# EAGLE board Fenyjelzo_duplatranz lábcsere (EAGLE 7.2.0), part 1 of 2
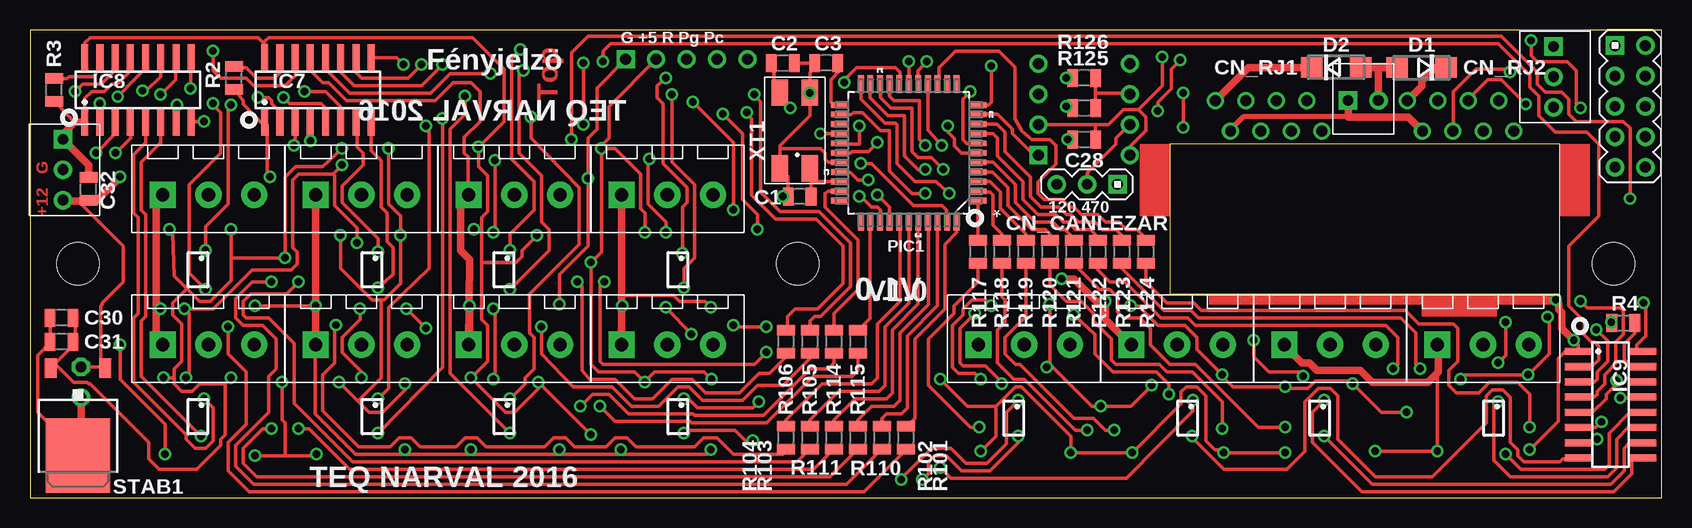
[diagram p0: board, top side]
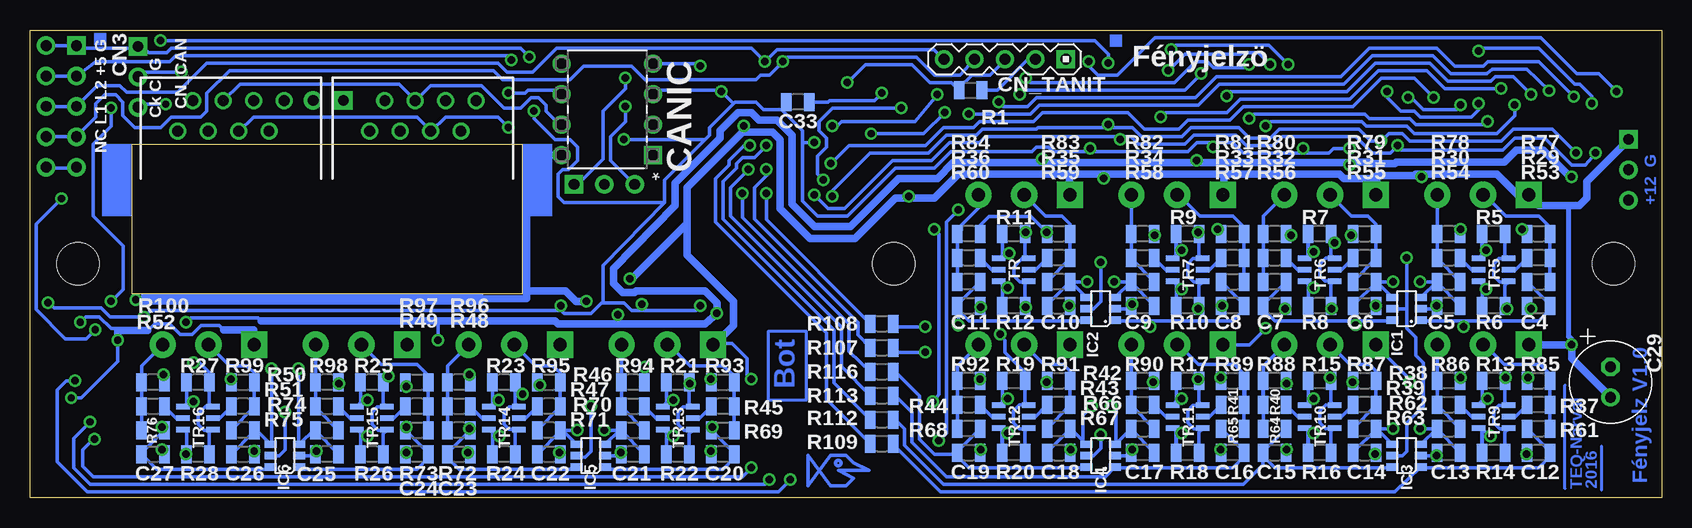
[diagram p1: board, bottom side, seen from below]

Size 136 x 39 mm. Coordinates in mm from the lower left corner, seen from the top.
Outline: 0,0 136,0 136,39 0,39 0,0
Outline: 127.5,29.5 95,29.5 95,17 127.5,17 127.5,29.5
Copper layers (1*16): Top 0.035mm / dielectric 1.5mm / Bottom 0.035mm
Design rules "default": minimum track width 10mil, minimum drill 24mil, track to track 12mil, track to pad 12mil, pad to pad 12mil, via to via 12mil, smd to smd 0mil, copper to edge 12mil, drill to drill 8mil, minimum pad ring 10mil, minimum via ring 8mil, stop-mask expansion 4mil, vias tented up to drill 0mil, thermal gap 10mil
Net classes: 0 default: width 0.305 mm, clearance 0.305 mm; 1 Tap: width 0.406 mm, clearance 0.305 mm
Holes 3.5 mm at 64,19.5 4,19.5 132,19.5
tRestrict: area 60.5,16 to 67.5,23; area 0.5,16 to 7.5,23; area 128.5,16 to 135.5,23
bRestrict: area 60.5,16 to 67.5,23; area 0.5,16 to 7.5,23; area 128.5,16 to 135.5,23

## Footprints (pad centres in the part's own frame; a part is rotated, then mirrored left to right if it is on the bottom)
R0805 = smd 0.9 x 1.5: 1 -0.953,0; 2 0.953,0
C_EL1RASZT07 = drill 0.914 pad 1.524 octagon: P+ 1.27,0 | drill 0.914 pad 1.524: P- -1.27,0
DIP254P762X432-8 = drill 0.914 pad 1.524 square: 1 -3.81,3.81 | drill 0.914 pad 1.524: 2 -3.81,1.27; 3 -3.81,-1.27; 4 -3.81,-3.81; 5 3.81,-3.81; 6 3.81,-1.27; 7 3.81,1.27; 8 3.81,3.81
PIN05_2 = drill 0.914 pad 1.524 square: 1 -5.08,0 | drill 0.914 pad 1.524: 2 -5.08,2.54; 3 -2.54,0; 4 -2.54,2.54; 5 0,0; 6 0,2.54; 7 2.54,0; 8 2.54,2.54; 9 5.08,0; 10 5.08,2.54
PIN03_1 = drill 0.914 pad 1.524 square: 1 -2.54,0 | drill 0.914 pad 1.524: 2 0,0; 3 2.54,0
RJ45_CSAKPIN = drill 0.9 pad 1.4: 1 -4.445,3.81; 2 -3.175,6.35; 3 -1.905,3.81; 4 -0.635,6.35; 5 0.635,3.81; 6 1.905,6.35; 7 3.175,3.81; 8 4.445,6.35
PIN05_1 = drill 0.914 pad 1.524 square: 1 -5.08,0 | drill 0.914 pad 1.524: 2 -2.54,0; 3 0,0; 4 2.54,0; 5 5.08,0
DO214AC = smd 1.8 x 1.7: A 2.05,0; C -2.05,0
TSOP-6 = smd 0.6 x 1: 1 -0.95,-1.2; 2 0,-1.2; 3 0.95,-1.2; 4 0.95,1.2; 5 0,1.2; 6 -0.95,1.2
SO16 = smd 0.6 x 2.2: 1 -4.445,-2.695; 2 -3.175,-2.695; 3 -1.905,-2.695; 4 -0.635,-2.695; 5 0.635,-2.695; 6 1.905,-2.695; 7 3.175,-2.695; 8 4.445,-2.695; 9 4.445,2.695; 10 3.175,2.695; 11 1.905,2.695; 12 0.635,2.695; 13 -0.635,2.695; 14 -1.905,2.695; 15 -3.175,2.695; 16 -4.445,2.695
QFP80P1200X1200X120-44N = smd 1.473 x 0.483: 1 -5.74,3.988; 2 -5.74,3.2; 3 -5.74,2.388; 4 -5.74,1.6; 5 -5.74,0.787; 6 -5.74,0; 7 -5.74,-0.787; 8 -5.74,-1.6; 9 -5.74,-2.388; 10 -5.74,-3.2; 11 -5.74,-3.988; 23 5.74,-3.988; 24 5.74,-3.2; 25 5.74,-2.388; 26 5.74,-1.6; 27 5.74,-0.787; 28 5.74,0; 29 5.74,0.787; 30 5.74,1.6; 31 5.74,2.388; 32 5.74,3.2; 33 5.74,3.988 | smd 0.483 x 1.473: 12 -3.988,-5.74; 13 -3.2,-5.74; 14 -2.388,-5.74; 15 -1.6,-5.74; 16 -0.787,-5.74; 17 0,-5.74; 18 0.787,-5.74; 19 1.6,-5.74; 20 2.388,-5.74; 21 3.2,-5.74; 22 3.988,-5.74; 34 3.988,5.74; 35 3.2,5.74; 36 2.388,5.74; 37 1.6,5.74; 38 0.787,5.74; 39 0,5.74; 40 -0.787,5.74; 41 -1.6,5.74; 42 -2.388,5.74; 43 -3.2,5.74; 44 -3.988,5.74
R0805@1 = smd 0.9 x 1.5: 1 -0.953,0; 2 0.953,0
TO252 = smd 1 x 1.6: 1 -2.28,-4.8; 2 2.28,-4.8 | smd 5.4 x 6.2: 3 0,2.5
SOT26 = smd 0.45 x 1.1: P$1 -0.95,-1.25; P$2 0,-1.25; P$3 0.95,-1.25; P$4 0.95,1.25; P$5 0,1.25; P$6 -0.95,1.25
FEHER_TUS_3 = drill 0.914 pad 1.524 square: P$1 0,0 | drill 0.914 pad 1.524: P$2 2.54,0; P$3 5.08,0
FEHER_TUS_2 = drill 0.914 pad 1.524 square: P$1 0,0 | drill 0.914 pad 1.524: P$2 2.54,0
12SMX-B = smd 2.2 x 1.4: 1 -3.15,-1.25; 2 -3.15,1.25; 3 3.15,1.25; 4 3.15,-1.25
ZOLD_KICSI_3P = drill 1.1 pad 2.184 square: 1 -3.81,-0.5 | drill 1.1 pad 2.184: 2 0,-0.5; 3 3.81,-0.5

## Placement (x,y rotation side)
C1  22  [R0805]  64.16,25.09 180 top
C2  22  [R0805]  62.75,36.25 0 top
C3  10u  [R0805]  66.38,36.25 180 top
C4  [R0805]  10.25,16 180 bottom
C5  [R0805]  17.75,16 180 bottom
C6  [R0805]  24.75,16 0 bottom
C7  [R0805]  32.25,16 0 bottom
C8  [R0805]  35.75,16 180 bottom
C9  [R0805]  43.25,16 180 bottom
C10  [R0805]  50.25,16 0 bottom
C11  [R0805]  57.75,16 0 bottom
C12  [R0805]  10.25,3.75 180 bottom
C13  [R0805]  17.75,3.75 180 bottom
C14  [R0805]  24.75,3.75 0 bottom
C15  [R0805]  32.25,3.75 0 bottom
C16  [R0805]  35.75,3.75 180 bottom
C17  [R0805]  43.25,3.75 180 bottom
C18  [R0805]  50.25,3.75 0 bottom
C19  [R0805]  57.75,3.75 0 bottom
C20  [R0805]  78.25,3.62 180 bottom
C21  [R0805]  85.75,3.62 180 bottom
C22  [R0805]  92.75,3.62 0 bottom
C23  [R0805]  100.25,3.62 0 bottom
C24  [R0805]  103.75,3.62 180 bottom
C25  [R0805]  111.25,3.62 180 bottom
C26  [R0805]  118.25,3.62 0 bottom
C27  [R0805]  125.75,3.62 0 bottom
C28  100n  [R0805]  87.88,29.88 0 top
C29  100u  [C_EL1RASZT07]  4.25,9.62 90 bottom
C30  10u  [R0805]  2.62,13 180 top
C31  100n  [R0805]  2.62,15 180 top
C32  100n  [R0805]  4.88,25.75 90 top
C33  100n  [R0805]  72,33 180 bottom
CANIC  MCP2551  [DIP254P762X432-8]  87.88,32.38 180 bottom
CN3  PIN05_2'THT'  [PIN05_2]  132.12,32.62 270 top
CN_CANLEZAR  PIN03_1  [PIN03_1]  88.12,26.12 180 top
CN_RJ1  RJ45_CSAKPIN  [RJ45_CSAKPIN]  103.25,26.75 0 bottom
CN_RJ2  RJ45_CSAKPIN  [RJ45_CSAKPIN]  119.25,26.75 0 bottom
CN_TANIT  PIN05_1  [PIN05_1]  54.73,36.56 180 bottom
D1  DDO214AC  [DO214AC]  116,35.88 180 top
D2  DDO214AC  [DO214AC]  108.88,35.88 0 top
IC1  BEM_VEDO  [TSOP-6]  21.25,15.75 90 bottom
IC2  BEM_VEDO  [TSOP-6]  46.75,15.75 90 bottom
IC3  BEM_VEDO  [TSOP-6]  21.25,3.5 90 bottom
IC4  BEM_VEDO  [TSOP-6]  46.75,3.5 90 bottom
IC5  BEM_VEDO  [TSOP-6]  89.25,3.5 90 bottom
IC6  BEM_VEDO  [TSOP-6]  114.75,3.5 90 bottom
IC7  SCT2168SOP16  [SO16]  24,34 0 top
IC8  SCT2168SOP16  [SO16]  9,34 0 top
IC9  SCT2168SOP16  [SO16]  131.75,7.75 270 top
PIC1  PIC18F45K80-I/PT  [QFP80P1200X1200X120-44N]  73.25,28.75 180 top
R1  2.2k  [R0805@1]  57.59,33.97 0 bottom
R2  [R0805@1]  17,35 90 top
R3  [R0805@1]  2,34 90 top
R4  [R0805@1]  132.81,14.56 0 top
R5  10k  [R0805@1]  14,22 180 bottom
R6  10k  [R0805@1]  14,16 180 bottom
R7  10k  [R0805@1]  28.5,22 180 bottom
R8  10k  [R0805@1]  28.5,16 180 bottom
R9  10k  [R0805@1]  39.5,22 180 bottom
R10  10k  [R0805@1]  39.5,16 180 bottom
R11  10k  [R0805@1]  54,22 180 bottom
R12  10k  [R0805@1]  54,16 180 bottom
R13  [R0805@1]  14,9.75 180 bottom
R14  [R0805@1]  14,3.75 180 bottom
R15  [R0805@1]  28.5,9.75 180 bottom
R16  [R0805@1]  28.5,3.75 180 bottom
R17  [R0805@1]  39.5,9.75 180 bottom
R18  [R0805@1]  39.5,3.75 180 bottom
R19  [R0805@1]  54,9.75 180 bottom
R20  [R0805@1]  54,3.75 180 bottom
R21  [R0805@1]  82,9.62 180 bottom
R22  [R0805@1]  82,3.62 180 bottom
R23  [R0805@1]  96.5,9.62 180 bottom
R24  [R0805@1]  96.5,3.62 180 bottom
R25  [R0805@1]  107.5,9.62 180 bottom
R26  [R0805@1]  107.5,3.62 180 bottom
R27  [R0805@1]  122,9.62 180 bottom
R28  [R0805@1]  122,3.62 180 bottom
R29  [R0805@1]  10.25,20 180 bottom
R30  [R0805@1]  17.75,20 0 bottom
R31  [R0805@1]  24.75,20 180 bottom
R32  [R0805@1]  32.25,20 0 bottom
R33  [R0805@1]  35.75,20 180 bottom
R34  [R0805@1]  43.25,20 0 bottom
R35  [R0805@1]  50.25,20 180 bottom
R36  [R0805@1]  57.75,20 0 bottom
R37  [R0805@1]  10.25,7.75 180 bottom
R38  [R0805@1]  17.75,7.75 0 bottom
R39  [R0805@1]  24.75,7.75 180 bottom
R40  [R0805@1]  32.25,7.75 0 bottom
R41  [R0805@1]  35.75,7.75 180 bottom
R42  [R0805@1]  43.25,7.75 0 bottom
R43  [R0805@1]  50.25,7.75 180 bottom
R44  [R0805@1]  57.75,7.75 0 bottom
R45  [R0805@1]  78.25,7.62 180 bottom
R46  [R0805@1]  85.75,7.62 0 bottom
R47  [R0805@1]  92.75,7.62 180 bottom
R48  [R0805@1]  100.25,7.62 0 bottom
R49  [R0805@1]  103.75,7.62 180 bottom
R50  [R0805@1]  111.25,7.62 0 bottom
R51  [R0805@1]  118.25,7.62 180 bottom
R52  [R0805@1]  125.75,7.62 0 bottom
R53  [R0805@1]  10.25,18 0 bottom
R54  [R0805@1]  17.75,18 0 bottom
R55  [R0805@1]  24.75,18 180 bottom
R56  [R0805@1]  32.25,18 180 bottom
R57  [R0805@1]  35.75,18 0 bottom
R58  [R0805@1]  43.25,18 0 bottom
R59  [R0805@1]  50.25,18 180 bottom
R60  [R0805@1]  57.75,18 180 bottom
R61  [R0805@1]  10.25,5.75 0 bottom
R62  [R0805@1]  17.75,5.75 0 bottom
R63  [R0805@1]  24.75,5.75 180 bottom
R64  [R0805@1]  32.25,5.75 180 bottom
R65  [R0805@1]  35.75,5.75 0 bottom
R66  [R0805@1]  43.25,5.75 0 bottom
R67  [R0805@1]  50.25,5.75 180 bottom
R68  [R0805@1]  57.75,5.75 180 bottom
R69  [R0805@1]  78.25,5.62 0 bottom
R70  [R0805@1]  85.75,5.62 0 bottom
R71  [R0805@1]  92.75,5.62 180 bottom
R72  [R0805@1]  100.25,5.62 180 bottom
R73  [R0805@1]  103.75,5.62 0 bottom
R74  [R0805@1]  111.25,5.62 0 bottom
R75  [R0805@1]  118.25,5.62 180 bottom
R76  [R0805@1]  125.75,5.62 180 bottom
R77  [R0805@1]  10.25,22 0 bottom
R78  [R0805@1]  17.75,22 180 bottom
R79  [R0805@1]  24.75,22 0 bottom
R80  [R0805@1]  32.25,22 180 bottom
R81  [R0805@1]  35.75,22 0 bottom
R82  [R0805@1]  43.25,22 180 bottom
R83  [R0805@1]  50.25,22 0 bottom
R84  [R0805@1]  57.75,22 180 bottom
R85  [R0805@1]  10.25,9.75 0 bottom
R86  [R0805@1]  17.75,9.75 180 bottom
R87  [R0805@1]  24.75,9.75 0 bottom
R88  [R0805@1]  32.25,9.75 180 bottom
R89  [R0805@1]  35.75,9.75 0 bottom
R90  [R0805@1]  43.25,9.75 180 bottom
R91  [R0805@1]  50.25,9.75 0 bottom
R92  [R0805@1]  57.75,9.75 180 bottom
R93  [R0805@1]  78.25,9.62 0 bottom
R94  [R0805@1]  85.75,9.62 180 bottom
R95  [R0805@1]  92.75,9.62 0 bottom
R96  [R0805@1]  100.25,9.62 180 bottom
R97  [R0805@1]  103.75,9.62 0 bottom
R98  [R0805@1]  111.25,9.62 180 bottom
R99  [R0805@1]  118.25,9.62 0 bottom
R100  [R0805@1]  125.75,9.62 180 bottom
R101  [R0805@1]  73,5 270 top
R102  [R0805@1]  71,5 270 top
R103  [R0805@1]  65,5 270 top
R104  [R0805@1]  63,5 270 top
R105  [R0805@1]  65,13 270 top
R106  [R0805@1]  63,13 270 top
R107  [R0805@1]  65,12.5 0 bottom
R108  [R0805@1]  65,14.5 0 bottom
R109  [R0805@1]  65,4.5 0 bottom
R110  [R0805@1]  69,5 270 top
R111  [R0805@1]  67,5 270 top
R112  [R0805@1]  65,6.5 0 bottom
R113  [R0805@1]  65,8.5 0 bottom
R114  [R0805@1]  67,13 270 top
R115  [R0805@1]  69,13 270 top
R116  [R0805@1]  65,10.5 0 bottom
R117  [R0805@1]  79,20.5 270 top
R118  [R0805@1]  81,20.5 270 top
R119  [R0805@1]  83,20.5 270 top
R120  [R0805@1]  85,20.5 270 top
R121  [R0805@1]  87,20.5 270 top
R122  [R0805@1]  89,20.5 270 top
R123  [R0805@1]  91,20.5 270 top
R124  [R0805@1]  93,20.5 270 top
R125  470  [R0805@1]  87.88,35 180 top
R126  120  [R0805@1]  87.88,32.5 0 top
STAB1  7805DT  [TO252]  4,6 180 top
TR  AP2625GY-HF-3SOT26  [SOT26]  54,19 270 bottom
TR5  [SOT26]  14,19 270 bottom
TR6  AP2625GY-HF-3SOT26  [SOT26]  28.5,19 270 bottom
TR7  AP2625GY-HF-3SOT26  [SOT26]  39.5,19 270 bottom
TR9  AP2625GY-HF-3SOT26  [SOT26]  14,6.75 270 bottom
TR10  AP2625GY-HF-3SOT26  [SOT26]  28.5,6.75 270 bottom
TR11  AP2625GY-HF-3SOT26  [SOT26]  39.5,6.75 270 bottom
TR12  AP2625GY-HF-3SOT26  [SOT26]  54,6.75 270 bottom
TR13  AP2625GY-HF-3SOT26  [SOT26]  82,6.62 270 bottom
TR14  AP2625GY-HF-3SOT26  [SOT26]  96.5,6.62 270 bottom
TR15  AP2625GY-HF-3SOT26  [SOT26]  107.5,6.62 270 bottom
TR16  AP2625GY-HF-3SOT26  [SOT26]  122,6.62 270 bottom
U$1  FEHER_TUS_3  [FEHER_TUS_3]  127,37.62 270 top
U$20  FEHER_TUS_3  [FEHER_TUS_3]  2.75,29.88 270 top
U$21  FEHER_TUS_2ALLO  [FEHER_TUS_2]  109.88,33.12 0 top
XT1  12SMX-B  [12SMX-B]  63.75,30.62 90 top
ZOLD_3P1  ZOLD_KICSI_3P  [ZOLD_KICSI_3P]  14.88,25.75 0 top
ZOLD_3P2  ZOLD_KICSI_3P  [ZOLD_KICSI_3P]  27.62,25.75 0 top
ZOLD_3P3  ZOLD_KICSI_3P  [ZOLD_KICSI_3P]  40.38,25.75 0 top
ZOLD_3P4  ZOLD_KICSI_3P  [ZOLD_KICSI_3P]  53.12,25.75 0 top
ZOLD_3P5  ZOLD_KICSI_3P  [ZOLD_KICSI_3P]  14.88,13.25 0 top
ZOLD_3P6  ZOLD_KICSI_3P  [ZOLD_KICSI_3P]  27.62,13.25 0 top
ZOLD_3P7  ZOLD_KICSI_3P  [ZOLD_KICSI_3P]  40.38,13.25 0 top
ZOLD_3P8  ZOLD_KICSI_3P  [ZOLD_KICSI_3P]  53.12,13.25 0 top
ZOLD_3P9  ZOLD_KICSI_3P  [ZOLD_KICSI_3P]  82.88,13.25 0 top
ZOLD_3P10  ZOLD_KICSI_3P  [ZOLD_KICSI_3P]  95.62,13.25 0 top
ZOLD_3P11  ZOLD_KICSI_3P  [ZOLD_KICSI_3P]  108.38,13.25 0 top
ZOLD_3P12  ZOLD_KICSI_3P  [ZOLD_KICSI_3P]  121.12,13.25 0 top

## Library data of the parts
C1-C33 R1-R126 = Cf_RLCPX
CANIC = Microchip_By_element14_Batch_1; DESCRIPTION: CAN CTRL; MPN: MCP2551-I/P; OC_FARNELL: 1292240; OC_NEWARK: 61K2947; PACKAGE: PDIP-8; SUPPLIER: Microchip
CN3 CN_CANLEZAR CN_TANIT = Cf_Csatl
CN_RJ1 CN_RJ2 IC1-IC6 TR TR5-TR7 TR9-TR16 ZOLD_3P1-ZOLD_3P12 = narval
D1 D2 = Cf_Felv
IC7-IC9 = Cf_IC
PIC1 = narval; DESCRIPTION: 8BIT MCU; MPN: PIC18F4580-I/PT; OC_FARNELL: 1528449; OC_NEWARK: 71J7258; PACKAGE: TQFP-44; SUPPLIER: Microchip
STAB1 = linear
U$1 U$20 U$21 = csatik
XT1 = crystal

## Nets
+5V: C28.1 C30.1 C31.1 C33.2 CANIC.3 CN3.3 CN3.4 CN_TANIT.2 IC1.5 IC2.5 IC3.5 IC4.5 IC5.5 IC6.5 IC7.16 IC8.16 IC9.16 PIC1.7 PIC1.28 R1.2 R77.1 R78.1 R79.1 R80.1 R81.1 R82.1 R83.1 R84.1 R85.1 R86.1 R87.1 R88.1 R89.1 R90.1 R91.1 R92.1 R93.1 R94.1 R95.1 R96.1 R97.1 R98.1 R99.1 R100.1 STAB1.2
+12V: C29.P+ C32.1 R5.1 R6.1 R7.1 R8.1 R9.1 R10.1 R11.1 R12.1 R13.1 R14.1 R15.1 R16.1 R17.1 R18.1 R19.1 R20.1 R21.1 R22.1 R23.1 R24.1 R25.1 R26.1 R27.1 R28.1 STAB1.1 TR5.P$4 TR5.P$6 TR6.P$4 TR6.P$6 TR7.P$4 TR7.P$6 TR9.P$4 TR9.P$6 TR10.P$4 TR10.P$6 TR11.P$4 TR11.P$6 TR12.P$4 TR12.P$6 TR13.P$4 TR13.P$6 TR14.P$4 TR14.P$6 TR15.P$4 TR15.P$6 TR16.P$4 TR16.P$6 TR.P$4 TR.P$6 U$20.P$3
GND: C1.2 C2.2 C3.2 C4.2 C5.2 C6.2 C7.2 C8.2 C9.2 C10.2 C11.2 C12.2 C13.2 C14.2 C15.2 C16.2 C17.2 C18.2 C19.2 C20.2 C21.2 C22.2 C23.2 C24.2 C25.2 C26.2 C27.2 C28.2 C29.P- C30.2 C31.2 C32.2 C33.1 CANIC.2 CANIC.8 CN3.1 CN3.2 CN_TANIT.1 IC1.2 IC2.2 IC3.2 IC4.2 IC5.2 IC6.2 IC7.1 IC7.13 IC8.1 IC8.13 IC9.1 IC9.13 PIC1.6 PIC1.29 R2.1 R3.1 R4.1 STAB1.3 U$1.P$1 U$20.P$1 XT1.2 XT1.4 ZOLD_3P1.1 ZOLD_3P2.1 ZOLD_3P3.1 ZOLD_3P4.1 ZOLD_3P5.1 ZOLD_3P6.1 ZOLD_3P7.1 ZOLD_3P8.1 ZOLD_3P9.1 ZOLD_3P10.1 ZOLD_3P11.1 ZOLD_3P12.1
N$1: C3.1 PIC1.23
N$2: CN_TANIT.3 PIC1.18 R1.1
N$3: CN3.7 CN3.8 CN_TANIT.4 PIC1.17
N$4: IC7.14 IC8.2
N$5: C1.1 PIC1.31 XT1.1
N$6: C2.1 PIC1.30 XT1.3
N$7: PIC1.19 R112.1
N$8: PIC1.20 R113.1
N$9: PIC1.22 R116.1
N$10: PIC1.21 R107.1
N$11: PIC1.24 R108.1
N$12: IC8.7 R15.2 TR10.P$1
N$13: IC7.6 R6.2 TR5.P$3
N$14: IC9.5 R21.2 TR13.P$1
N$15: IC8.15 R3.2
N$16: IC8.5 R13.2 TR9.P$1
N$17: IC7.3 IC8.3 IC9.3 PIC1.37
N$18: IC7.4 IC8.4 IC9.4 PIC1.36
N$19: IC9.6 R22.2 TR13.P$3
N$20: IC9.7 R23.2 TR14.P$1
N$21: IC7.8 R8.2 TR6.P$3
N$22: IC9.15 R4.2
N$23: CN_CANLEZAR.1 R125.2
N$24: IC9.8 R24.2 TR14.P$3
N$25: IC8.6 R14.2 TR9.P$3
N$26: IC7.5 R5.2 TR5.P$1
N$27: IC7.7 R7.2 TR6.P$1
N$28: IC8.8 R16.2 TR10.P$3
N$29: IC9.9 R25.2 TR15.P$1
N$30: IC8.9 R17.2 TR11.P$1
N$31: IC9.10 R26.2 TR15.P$3
N$32: IC8.10 R18.2 TR11.P$3
N$33: IC7.9 R9.2 TR7.P$1
N$34: IC9.11 R27.2 TR16.P$1
N$35: IC8.11 R19.2 TR12.P$1
N$36: IC8.12 R20.2 TR12.P$3
N$37: IC7.10 R10.2 TR7.P$3
N$38: IC7.11 R11.2 TR.P$1
N$39: IC7.12 R12.2 TR.P$3
N$40: IC9.12 R28.2 TR16.P$3
N$41: R29.2 TR5.P$5
N$42: R30.2 TR5.P$2
N$43: R31.2 TR6.P$5
N$44: R32.2 TR6.P$2
N$45: R33.2 TR7.P$5
N$46: R34.2 TR7.P$2
N$47: R35.2 TR.P$5
N$48: R36.2 TR.P$2
N$49: R37.2 TR9.P$5
N$50: R38.2 TR9.P$2
N$51: R39.2 TR10.P$5
N$52: R40.2 TR10.P$2
N$53: R41.2 TR11.P$5
N$54: R42.2 TR11.P$2
N$55: R43.2 TR12.P$5
N$56: R44.2 TR12.P$2
N$57: R45.2 TR13.P$5
N$58: R46.2 TR13.P$2
N$59: R47.2 TR14.P$5
N$60: R48.2 TR14.P$2
N$61: R49.2 TR15.P$5
N$62: R50.2 TR15.P$2
N$63: IC7.2 PIC1.43
N$64: R51.2 TR16.P$5
N$65: R52.2 TR16.P$2
N$66: CN3.5 CN3.6 CN_TANIT.5 PIC1.16
N$67: PIC1.27 R105.1
N$68: R31.1 R55.2 R79.2 ZOLD_3P2.2
N$69: R32.1 R56.2 R80.2 ZOLD_3P2.3
N$70: R33.1 R57.2 R81.2 ZOLD_3P3.2
N$71: PIC1.26 R106.1
N$72: R35.1 R59.2 R83.2 ZOLD_3P4.2
N$73: R36.1 R60.2 R84.2 ZOLD_3P4.3
N$74: R37.1 R61.2 R85.2 ZOLD_3P5.2
N$75: R38.1 R62.2 R86.2 ZOLD_3P5.3
N$76: R39.1 R63.2 R87.2 ZOLD_3P6.2
N$77: R40.1 R64.2 R88.2 ZOLD_3P6.3
N$78: R41.1 R65.2 R89.2 ZOLD_3P7.2
N$79: R42.1 R66.2 R90.2 ZOLD_3P7.3
N$80: R43.1 R67.2 R91.2 ZOLD_3P8.2
N$81: R44.1 R68.2 R92.2 ZOLD_3P8.3
N$82: R45.1 R69.2 R93.2 ZOLD_3P9.2
N$83: R46.1 R70.2 R94.2 ZOLD_3P9.3
N$84: R47.1 R71.2 R95.2 ZOLD_3P10.2
N$85: R48.1 R72.2 R96.2 ZOLD_3P10.3
N$86: R49.1 R73.2 R97.2 ZOLD_3P11.2
N$87: IC7.15 R2.2
N$88: R50.1 R74.2 R98.2 ZOLD_3P11.3
N$89: R51.1 R75.2 R99.2 ZOLD_3P12.2
N$90: R52.1 R76.2 R100.2 ZOLD_3P12.3
N$91: C4.1 IC1.1 R53.1 R101.2
N$92: R29.1 R53.2 R77.2 ZOLD_3P1.2
N$93: C5.1 IC1.3 R54.1 R102.2
N$94: C6.1 IC1.4 R55.1 R103.2
N$95: C7.1 IC1.6 R56.1 R104.2
N$96: C11.1 IC2.6 R60.1 R108.2
N$97: R34.1 R58.2 R82.2 ZOLD_3P3.3
N$98: C8.1 IC2.1 R57.1 R105.2
N$99: CANIC.7 CN_CANLEZAR.2 CN_RJ1.4 CN_RJ2.4 U$1.P$3
N$100: C12.1 IC3.1 R61.1 R109.2
N$101: C13.1 IC3.3 R62.1 R110.2
N$102: C17.1 IC4.3 R66.1 R114.2
N$103: C15.1 IC3.6 R64.1 R112.2
N$104: C16.1 IC4.1 R65.1 R113.2
N$105: R30.1 R54.2 R78.2 ZOLD_3P1.3
N$106: C18.1 IC4.4 R67.1 R115.2
N$107: C19.1 IC4.6 R68.1 R116.2
N$108: C20.1 IC5.1 R69.1 R117.2
N$109: C21.1 IC5.3 R70.1 R118.2
N$110: C22.1 IC5.4 R71.1 R119.2
N$111: C23.1 IC5.6 R72.1 R120.2
N$112: C24.1 IC6.1 R73.1 R121.2
N$113: C25.1 IC6.3 R74.1 R122.2
N$114: C26.1 IC6.4 R75.1 R123.2
N$115: C27.1 IC6.6 R76.1 R124.2
N$116: PIC1.25
N$117: PIC1.5 R121.1
N$118: PIC1.4 R120.1
N$119: C14.1 IC3.4 R63.1 R111.2
N$120: PIC1.3 R119.1
N$121: PIC1.2 R118.1
N$122: PIC1.41 R110.1
N$123: PIC1.40 R111.1
N$124: PIC1.39 R103.1
N$125: PIC1.38 R104.1
N$126: PIC1.1 R117.1
N$127: PIC1.44 R101.1
N$128: PIC1.42 R102.1
N$129: PIC1.35 R115.1
N$130: PIC1.32 R114.1
N$131: CANIC.6 CN_RJ1.5 CN_RJ2.5 R125.1 R126.2 U$1.P$2
N$132: CANIC.1 PIC1.10
N$133: C10.1 IC2.4 R59.1 R107.2
N$134: C9.1 IC2.3 R58.1 R106.2
N$135: PIC1.15 R109.1
N$136: PIC1.14 R124.1
N$137: CANIC.4 PIC1.11
N$138: CN_CANLEZAR.3 R126.1
N$139: PIC1.9 R123.1
N$140: PIC1.8 R122.1
N$141: CN3.9 CN3.10
N$143: IC8.14 IC9.2
N$144: CN_RJ2.8 D1.C
N$145: CN_RJ1.7 CN_RJ2.7 U$21.P$1
N$146: D1.A D2.A U$21.P$2
N$147: CN_RJ1.8 D2.C